# Altium PCB ENCODER_OD12_5V.PcbDoc
Units mil, origin at the board's own origin, x right, y up, seen from the top; angles counter-clockwise.
Board outline 6000 x 4000 mil, 2 copper layers (Top Layer, Bottom Layer); 3 components, 8 nets, 26 pads, 0 vias.
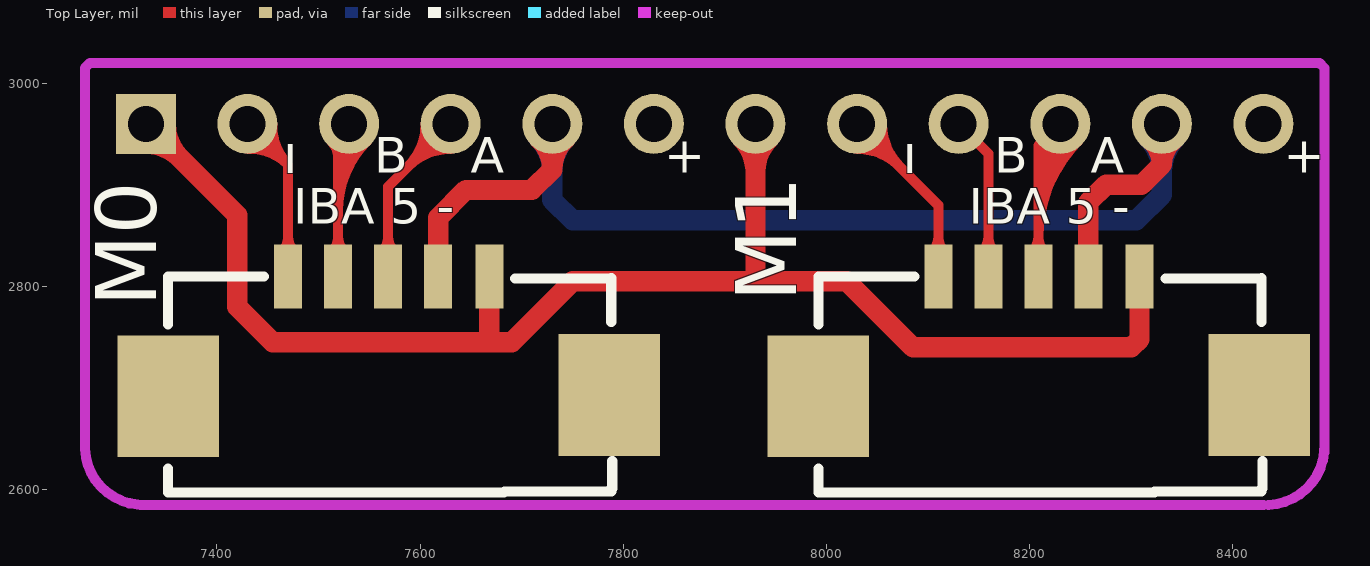
[diagram p0: Top Layer view]
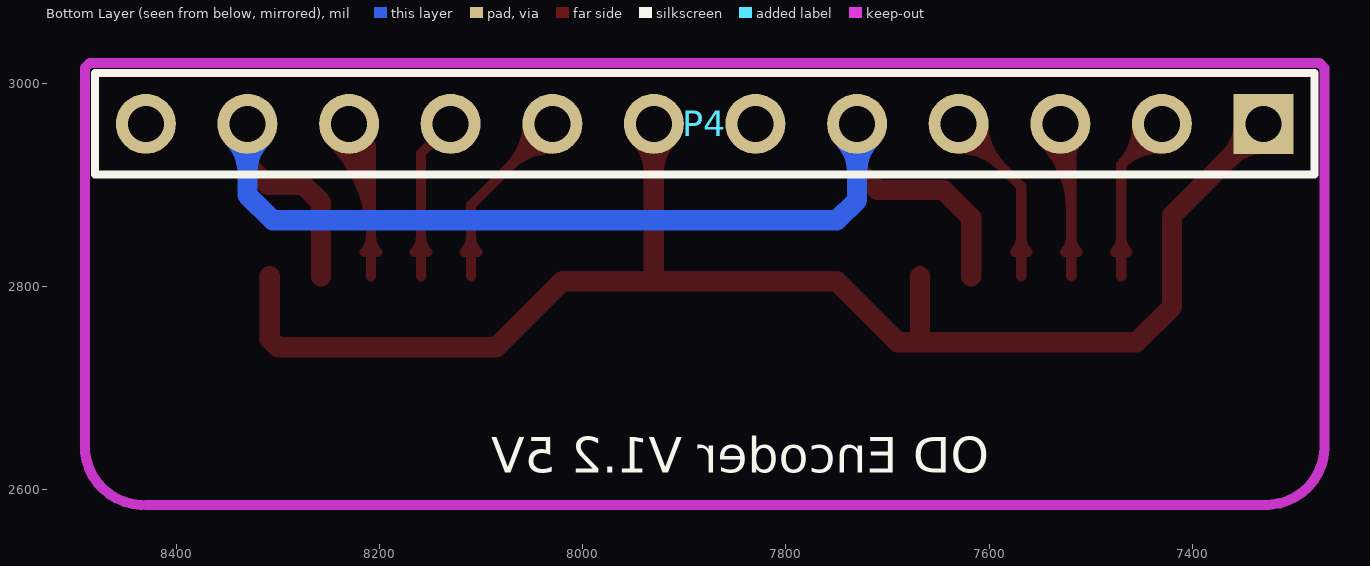
[diagram p1: Bottom Layer view, seen from below]

## Layer stack, top to bottom
Top Layer: signal copper 1.4
Dielectric: dielectric 12.6, FR-4, Dk 4.8
Bottom Layer: signal copper 1.4

## Board outline
1000,1000 7000,1000 7000,5000 1000,5000

## Design rules (kind name [scope] priority, off if disabled: settings)
Clearance [All] p1: gap=10
PolygonConnect [All] p1: connectstyle=Relief reliefconductorwidth=10 reliefentries=4 polygonreliefangle="90 Angle"
RoutingVias [All] p1: holewidth=28 width=50 viastyle="Through Hole" minholewidth=16 minwidth=25 maxholewidth=28 maxwidth=50
SilkscreenOverComponentPads [All] p1: minsilkscreentomaskgap=10
SolderMaskExpansion [All] p1: expansion=4
Width [All] p1: maxlimit=20 minlimit=10 preferedwidth=10 minimp=50.000000 maximp=50.000000 favimp=50.000000
27 further rules are at their usual default settings.

## Components (designator, comment, footprint, x,y, rotation, side; value= is the part's Value field where it differs from the comment)
M0 "Header 5" PH1.25_5 7470,2810 r0 top (schematic designator M1)
M1 "Header 5" PH1.25_5 8110,2810 r0 top (schematic designator M0)
P4 "Header 12" HDR1X12 7330,2960 r0 bottom

## Footprints (in the part's own frame and the unit in brackets; to place one, negate y for a bottom-side part, rotate by r counter-clockwise, add the part's x,y. Pads: shape width x height; smd on the part's side, far side on the other; paste and mask are expansions set on the pad)
HDR1X12 [mm] "Connector; Header; 12 Position"
  rect 1.5x1.5 hole 0.9: 1(0,0)
  round 1.5 hole 0.9: 2(2.54,0) 3(5.08,0) 4(7.62,0) 5(10.16,0) 6(12.7,0) 7(15.24,0) 8(17.78,0) 9(20.32,0) 10(22.86,0) 11(25.4,0) 12(27.94,0)
  silkscreen extent -1.27,-1.27 29.21,1.27
PH1.25_5 [mm]
  rect 0.7x1.6 smd: 1(0,0) 2(1.25,0) 3(2.5,0) 4(3.75,0) 5(5.029,0)
  rect 2.54x3.048 smd: ""(-3,-3) ""(8.026,-2.972)
  silkscreen extent -3,-5.4 8.1,0

## Part data
M0 M1: "Header, 5-Pin"
P4: "Header, 12-Pin"

## Nets (pads, with @x,y where several pads share a name; then routed paths per layer and width w, separated by ;. In a path a pad name is that pad's centre, name@x,y a point inside that pad or via, vN(x,y) a via of type N, cw(c..) or ccw(c..) an arc to the next point about the centre after c; other vN are vias at no path point)
3.3V: M0.4 M1.4 P4.5 P4.11 | length 1472.4
  Top Layer w20: M0.4 7617.64,2867.64 7645,2895 7710,2895 7730,2915 ; P4.5@7716.66,2945.74 cw(c7687.92,2915) 7730,2915 ; P4.5 7730,2915 ; P4.5@7743.34,2945.74 ccw(c7772.08,2915) 7730,2915 ; M1.4 8257.64,2882.64 8275,2900 8310,2900 8330,2920 ; P4.11@8317.99,2944.6 cw(c8298.8,2920) 8330,2920 ; P4.11 8330,2920 ; P4.11@8342.01,2944.6 ccw(c8361.2,2920) 8330,2920
  Bottom Layer w20: P4.5@7716.19,2946.19 cw(c7682.86,2912.86) 7730,2912.86 cw(c7777.14,2912.86) P4.5@7743.81,2946.19 ; P4.5 7730,2885 7750,2865 8305,2865 8330,2890 P4.11 ; P4.11@8316.19,2946.19 cw(c8282.86,2912.86) 8330,2912.86 cw(c8377.14,2912.86) P4.11@8343.81,2946.19
A1: M1.3 P4.10 | length 495.9
  Top Layer w10: M1.3@8202.22,2833.92 ccw(c8187.23,2848.91) 8208.43,2848.91 ccw(c8229.62,2848.91) M1.3@8214.63,2833.92 ; M1.3 8208.43,2938.43 P4.10 ; 8208.43,2848.7 cw(c8341.3,2848.7) P4.10@8247.34,2942.66 ; 8208.43,2872.84 cw(c8317.16,2872.84) P4.10@8240.27,2949.73 ; 8208.43,2896.98 cw(c8293.02,2896.98) P4.10@8233.2,2956.8 ; 8208.43,2921.13 cw(c8268.87,2921.13) P4.10@8226.13,2963.87
A2: M0.3 P4.4 | length 356.9
  Top Layer w10: M0.3@7562.22,2833.92 ccw(c7547.23,2848.91) 7568.43,2848.91 ccw(c7589.62,2848.91) M0.3@7574.63,2833.92 ; M0.3 7568.43,2898.43 P4.4 ; P4.4@7605.47,2960 cw(c7546.26,2960) 7588.13,2918.13 cw(c7630,2876.26) P4.4@7630,2935.47 ; P4.4@7615.47,2960 cw(c7580.4,2960) 7605.2,2935.2 cw(c7630,2910.4) P4.4@7630,2945.47
B1: M1.2 P4.9 | length 195.4
  Top Layer w10: P4.9 8159.21,2930.79 M1.2 ; M1.2@8153,2833.92 ccw(c8138.02,2848.91) 8159.21,2848.91 ccw(c8180.41,2848.91) M1.2@8165.42,2833.92
B2: M0.2 P4.3 | length 374.8
  Top Layer w10: P4.3@7512.66,2942.66 cw(c7496.83,2926.83) 7519.21,2926.83 ; M0.2@7513,2833.92 ccw(c7498.02,2848.91) 7519.21,2848.91 ccw(c7540.41,2848.91) M0.2@7525.42,2833.92 ; M0.2 7519.21,2949.21 P4.3 ; 7519.21,2874.74 cw(c7615.26,2874.74) P4.3@7547.34,2942.66 ; 7519.21,2898.88 cw(c7591.12,2898.88) P4.3@7540.27,2949.73 ; 7519.21,2923.03 cw(c7566.97,2923.03) P4.3@7533.2,2956.8
GND: M0.5 M1.5 P4.1 P4.7 | length 1603
  Top Layer w20: P4.1@7330,2940.47 cw(c7330,2893.33) 7363.34,2926.66 cw(c7396.67,2960) P4.1@7349.53,2960 ; P4.1 7420,2870 7420,2780 7455,2745 7690,2745 7750,2805 7930,2805 ; 7668,2747 M0.5 ; P4.7@7916.19,2946.19 cw(c7882.86,2912.86) 7930,2912.86 cw(c7977.14,2912.86) P4.7@7943.81,2946.19 ; P4.7 7930,2805 ; M1.5 8308,2748 8300,2740 8085,2740 8020,2805 7930,2805
I1: M1.1 P4.8 | length 364.5
  Top Layer w10: P4.8@8030,2935.47 cw(c8030,2876.26) 8071.87,2918.13 cw(c8113.74,2960) P4.8@8054.53,2960 ; P4.8@8030,2945.47 cw(c8030,2910.4) 8054.8,2935.2 cw(c8079.6,2960) P4.8@8044.53,2960 ; P4.8 8110,2880 M1.1 ; M1.1@8103.79,2833.92 ccw(c8088.8,2848.91) 8110,2848.91 ccw(c8131.2,2848.91) M1.1@8116.21,2833.92
I2: M0.1 P4.2 | length 337.9
  Top Layer w10: P4.2 7470,2920 ; P4.2@7430.48,2945.48 cw(c7431.51,2914.13) 7453.69,2936.31 cw(c7475.87,2958.49) P4.2@7444.52,2959.52 ; P4.2@7430.81,2935.49 cw(c7432.55,2882.55) 7470,2920 ; P4.2@7454.51,2959.19 ccw(c7507.45,2957.45) 7470,2920 ; M0.1@7463.79,2833.92 ccw(c7448.8,2848.91) 7470,2848.91 ccw(c7491.2,2848.91) M0.1@7476.21,2833.92 ; M0.1 7470,2920
pads on no net: M0. M1. P4.6 P4.12

## Keep-outs
Keep-Out Layer:
  lines w10: 7325,2585 8430,2585 ; 7330,2585 cw(c7327.5,2642.5) 7270,2640 7270,3015 7275,3020 8485,3020 8490,3015 8490,2645 cw(c8432.5,2642.5) 8435,2585

## Silkscreen, mask and mechanical layers (free items; w line width, h text height)
Top Overlay:
  text "I" at 7465,2900 h60
  text "B" at 7555,2900 h60
  text "A" at 7650,2900 h60
  text "+" at 7840,2900 h60
  text "I" at 8075,2900 h60
  text "B" at 8165,2900 h60
  text "A" at 8260,2900 h60
  text "+" at 8450,2900 h60
  text "IBA 5 -" at 7475,2850 h60
  text "IBA 5 -" at 8140,2850 h60
Bottom Overlay:
  text "OD Encoder V1.2 5V" at 7600,2605 h60